# Altium PCB ATMEGA128RF.PcbDoc
Units mm, origin at the board's own origin, x right, y up, seen from the top; angles counter-clockwise.
Board outline 50 x 50 mm, 2 copper layers (Top Layer, Bottom Layer), stack 0.871 mm thick; 56 components, 45 nets, 208 pads, 122 vias.
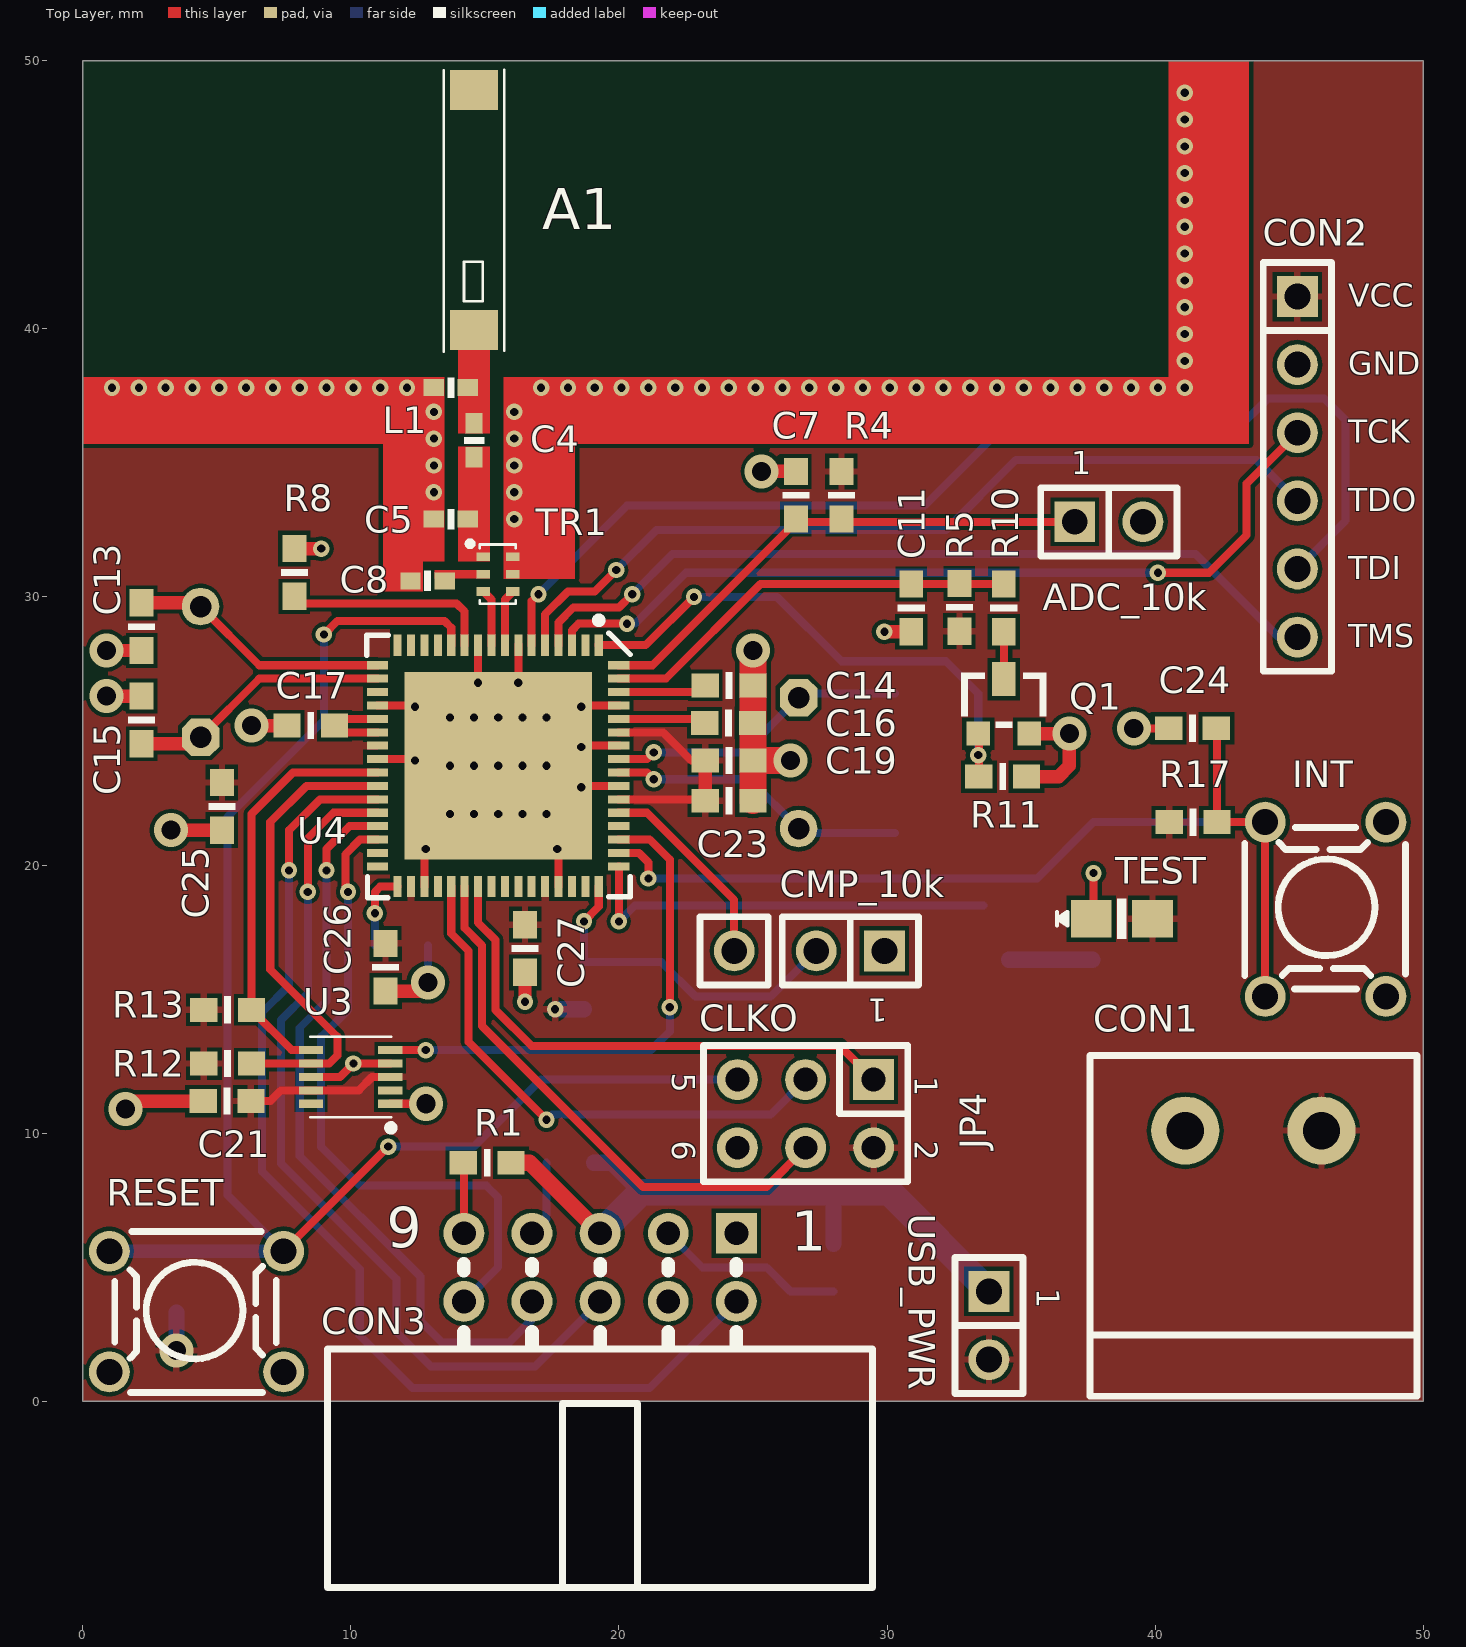
[diagram p0: Top Layer view]
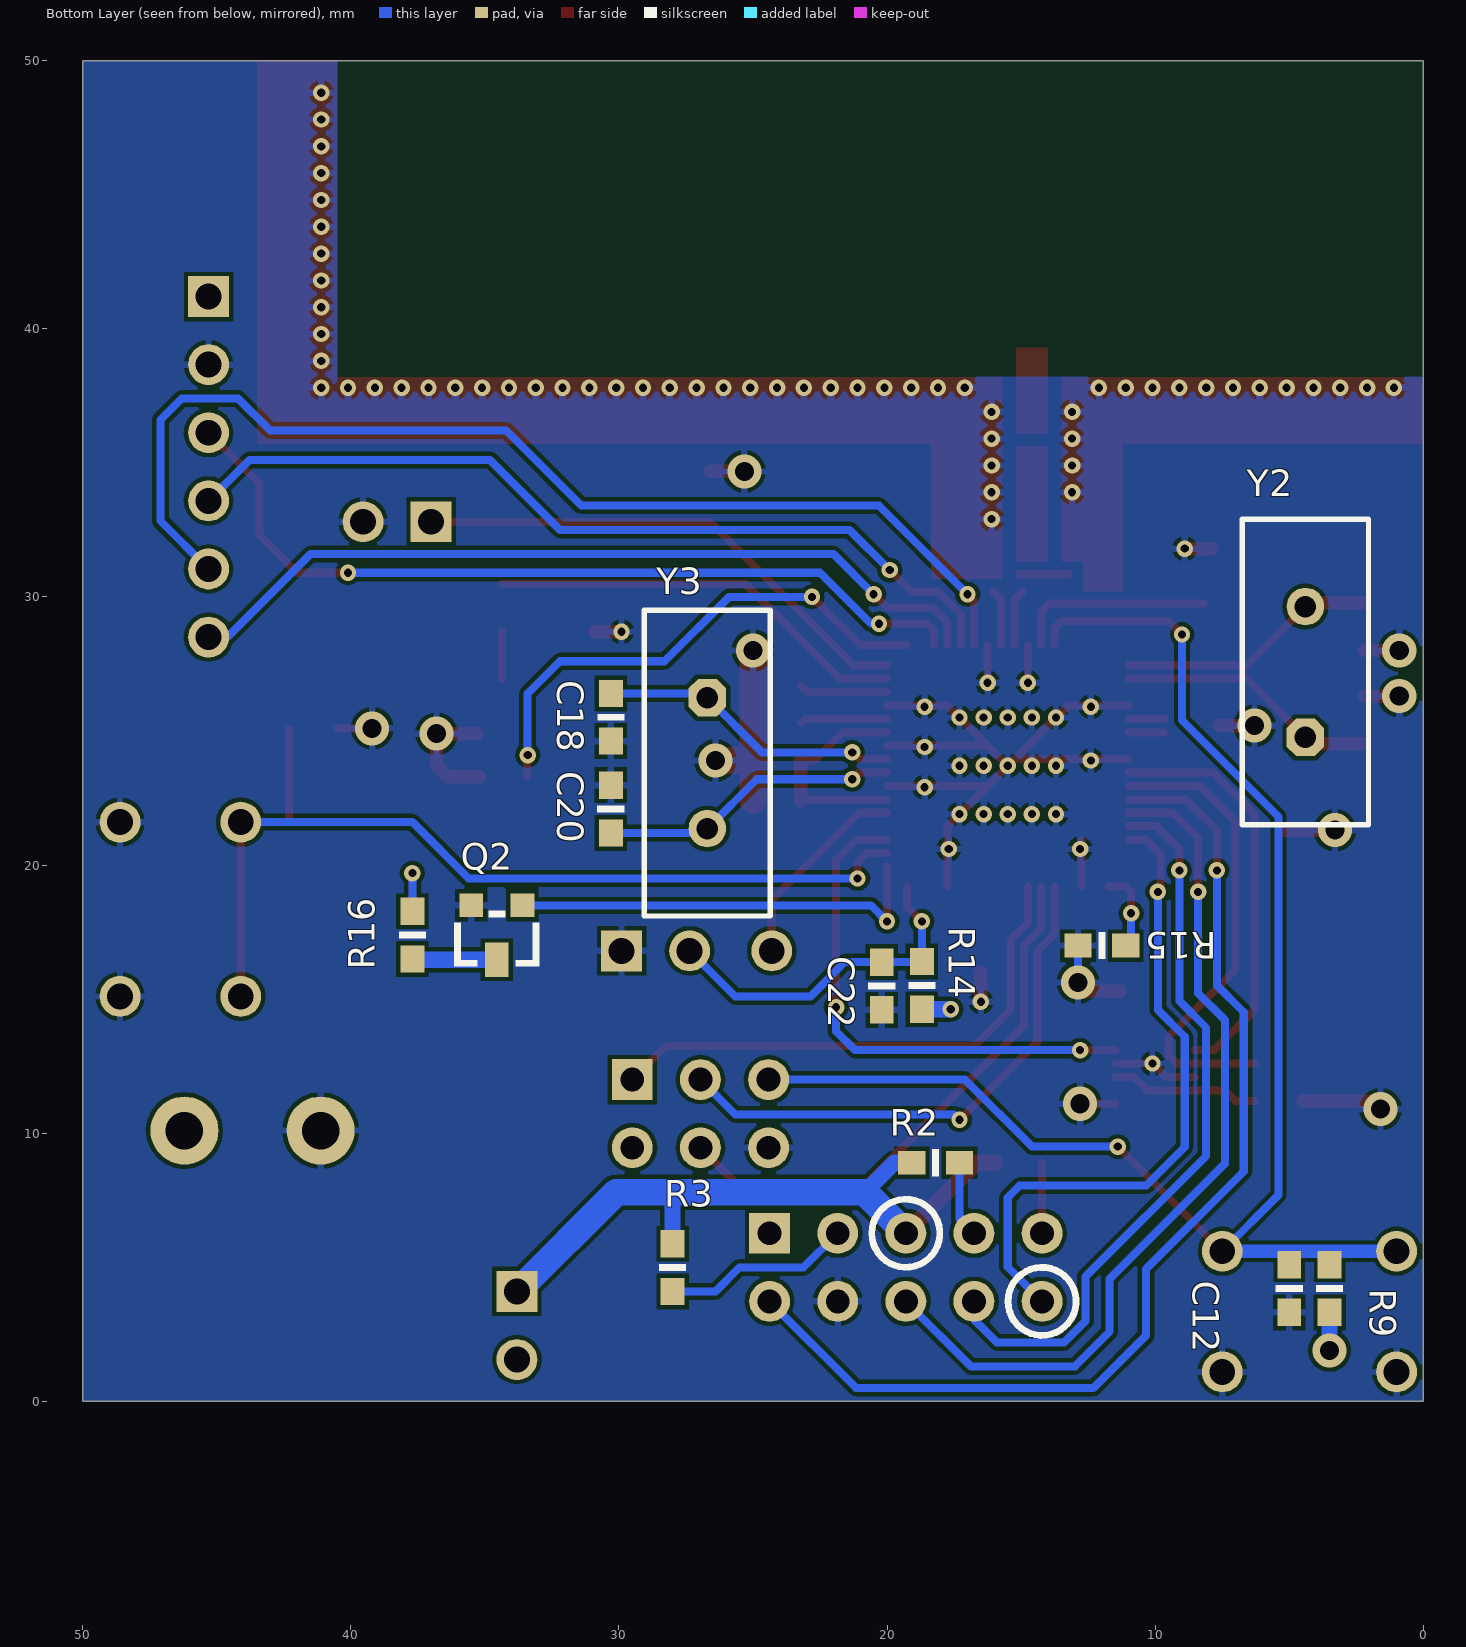
[diagram p1: Bottom Layer view, seen from below]

## Layer stack, top to bottom
Top Layer: signal copper 0.0356
Dielectric: core 0.8, FR-4, Dk 4.7
Bottom Layer: signal copper 0.0356

## Board outline
0,0 0,50 50,50 50,0 0,0

## Design rules (kind name [scope] priority, off if disabled: settings)
Clearance [All] p1: gap=0.152
HoleSize [All] p1: absolutevalues=TRUE maxlimit=2.54 minlimit=0.305 maxpercent=80.000 minpercent=20.000
PolygonConnect [All] p1: connectstyle=Relief reliefconductorwidth=0.254 reliefentries=4 polygonreliefangle="90 Angle"
RoutingVias [All] p1: holewidth=0.508 width=0.762 viastyle="Through Hole" minholewidth=0.305 minwidth=0.61 maxholewidth=0.711 maxwidth=1.27
SilkscreenOverComponentPads [All] p1: minsilkscreentomaskgap=0.254
SolderMaskExpansion [All] p1: expansion=0.102
Width [All] p1: maxlimit=2.54 minlimit=0.152 preferedwidth=0.254
26 further rules are at their usual default settings.

## Components (designator, comment, footprint, x,y, rotation, side; value= is the part's Value field where it differs from the comment)
A1 "2450AT45A100E" 2450AT45A100E 14.6,39.9 r90 top
ADC_10k "2P" SIP-2 37,32.8 r0 top
C4 "1.5pF" 0402 14.6,35.2 r90 top
C5 "1.5pF" 0402 13.1,32.9 r0 top
C7 "10nF" 0603 26.6,32.9 r90 top
C8 "22pF" 0402 13.5,30.6 r180 top
C11 "10nF" 0603 30.9,28.7 r90 top
C12 "10nF" 0603 5,5.1 r270 bottom
C13 "12pF" 0603 2.2,28 r90 top
C14 "1uF" 0603 25,26.7 r180 top
C15 "12pF" 0603 2.2,26.3 r270 top
C16 "1uF" 0603 23.2,25.3 r0 top
C17 "1uF" 0603 9.4,25.2 r180 top
C18 "12pF" 0603 30.3,26.4 r270 bottom
C19 "1uF" 0603 25,23.9 r180 top
C20 "12pF" 0603 30.3,21.2 r90 bottom
C21 "1uF" 0603 4.5,11.2 r0 top
C22 "10nF" 0603 20.2,14.6 r90 bottom
C23 "1uF" 0603 25,22.4 r180 top
C24 "10nF" 0603 40.5,25.1 r0 top
C25 "1uF" 0603 5.2,21.3 r90 top
C26 "1uF" 0603 11.3,15.3 r90 top
C27 "1uF" 0603 16.5,16 r90 top
CLKO "Test Point" TERMINAL 24.3,16.8 r0 top
CMP_10k "2P" SIP-2 29.9,16.8 r180 top
CON1 "2P" INTERLOCK2-5MM 46.2,10.1 r180 top
CON2 "6P" SIP-6-JTAG 45.3,41.2 r270 top
CON3 "10P" IDC-10-90 19.3,5 r0 top
INT "SW1" MICROSWITCH 44.1,21.6 r0 top
JP4 "6P" DIL-6 29.5,12 r270 top
L1 "3.9nH" 0402 13.1,37.8 r0 top
Q1 "BSS138" SOT-23@GSD 33.4,24.9 r0 top
Q2 "BSS138" SOT-23@GSD 33.6,18.5 r0 bottom
R1 "10K" 0603 14.2,8.9 r0 top
R2 "10K" 0603 17.3,8.9 r0 bottom
R3 "10K" 0603 28,4.1 r90 bottom
R4 "20K" 0603 28.3,32.9 r90 top
R5 "20K" 0603 32.7,30.5 r270 top
R8 "10K" 0603 7.9,31.8 r270 top
R9 "10K" 0603 3.5,5.1 r270 bottom
R10 "10K" 0603 34.35,28.7 r90 top
R11 "10K" 0603 35.2,23.3 r180 top
R12 "4.7k" 0603 6.3,12.6 r180 top
R13 "4.7k" 0603 6.3,14.6 r180 top
R14 "1K" 0603 18.7,16.4 r270 bottom
R15 "10K" 0603 11.1,17 r0 bottom
R16 "470R" 0603 37.7,16.5 r90 bottom
R17 "10K" 0603 42.3,21.6 r180 top
RESET "SW1" MICROSWITCH 1,1.1 r90 top
TEST "LED" 0805@DIODE 39.9,18 r180 top
TR1 "2450FB15L0001E" 0805@BALUN 15.95,30.2 r90 top
U3 "MMA7660FC" DFN-10 10,12.1 r180 top
U4 "ATmega128RFA1" QFN-64@EP 15.5,23.7 r270 top
USB_PWR "2P" SIP-2 33.8,4.1 r270 top
Y2 "32.768kHz" HC-49U 4.4,27.2 r90 bottom
Y3 "16MHz" HC-49U 26.7,23.8 r270 bottom

## Footprints (in the part's own frame and the unit in brackets; to place one, negate y for a bottom-side part, rotate by r counter-clockwise, add the part's x,y. Pads: shape width x height; smd on the part's side, far side on the other; paste and mask are expansions set on the pad)
0402 [mil]
  rect 30x25 smd: 1(0,0) 2(50,0)
  silkscreen extent 20,-15 30,15
0603 [mil]
  rect 40x35 smd: 1(0,0) 2(70,0)
  silkscreen extent 30,-20 40,20
0805@BALUN [mm]
  rect 0.32x0.5 smd: 1(1.3,1) 2(0.65,1) 3(0,1) 4(0,-0.1) 5(0.65,-0.1) 6(1.3,-0.1)
  silkscreen extent -0.46,-0.2 1.88,1.6
0805@DIODE [mil]
  rect 60x55 smd: A(0,0) K(90,0)
  silkscreen extent 38,-30 140,30
2450AT45A100E [mm]
  rect 1.5x1.8 smd: 1(0.05,0) ""(9,0)
  silkscreen extent -0.75,-1.12 9.75,1.12
DFN-10 [mm]
  rect 0.9x0.3 smd: 1(-1.475,1) 2(-1.475,0.5) 3(-1.475,0) 4(-1.475,-0.5) 5(-1.475,-1) 6(1.475,-1) 7(1.475,-0.5) 8(1.475,0) 9(1.475,0.5) 10(1.475,1)
  silkscreen extent -1.63,-1.5 1.5,2.02
DIL-6 [mil] "Dual inline 2x3 pins 2.54mm pitch"
  rect 60x60 hole 35: 1(0,0)
  round 60 hole 35: 2(100,0) 3(0,-100) 4(100,-100) 5(0,-200) 6(100,-200)
  silkscreen extent -50,-250 150,50
HC-49U [mm] "Quartz Crystal, Thru-Hole; 2 Leads; Body 11.35 x 4.65 x 13.46 mm (LxWxH max)"
  oct 1.4x1.4 hole 0.8: 1(-2.44,0)
  round 1.4 hole 0.8: 2(2.44,0)
  silkscreen extent -5.7,-2.35 5.7,2.35
IDC-10-90 [mil]
  rect 60x60 hole 35: 1(200,50)
  round 60 hole 35: 2(200,-50) 3(100,50) 4(100,-50) 5(0,50) 6(0,-50) 7(-100,50) 8(-100,-50) 9(-200,50) 10(-200,-50)
  silkscreen extent -400,-470 400,5
INTERLOCK2-5MM [mil]
  round 100 hole 55: 1(0,0) 2(200,0)
  silkscreen extent -140,-110 340,390
MICROSWITCH [mil]
  round 60 hole 38: 1(0,0) 2(177.16,0) 3(0,-255.9) 4(177.16,-255.9)
  silkscreen extent -30,-245 206,-8
QFN-64@EP [mm]
  rect 0.8x0.3 smd: 1(-4.5,3.75) 2(-4.5,3.25) 3(-4.5,2.75) 4(-4.5,2.25) 5(-4.5,1.75) 6(-4.5,1.25) 7(-4.5,0.75) 8(-4.5,0.25) 9(-4.5,-0.25) 10(-4.5,-0.75) 11(-4.5,-1.25) 12(-4.5,-1.75) 13(-4.5,-2.25) 14(-4.5,-2.75) 15(-4.5,-3.25) 16(-4.5,-3.75) 33(4.5,-3.75) 34(4.5,-3.25) 35(4.5,-2.75) 36(4.5,-2.25) 37(4.5,-1.75) 38(4.5,-1.25) 39(4.5,-0.75) 40(4.5,-0.25) 41(4.5,0.25) 42(4.5,0.75) 43(4.5,1.25) 44(4.5,1.75) 45(4.5,2.25) 46(4.5,2.75) 47(4.5,3.25) 48(4.5,3.75)
  rect 0.3x0.8 smd: 17(-3.75,-4.5) 18(-3.25,-4.5) 19(-2.75,-4.5) 20(-2.25,-4.5) 21(-1.75,-4.5) 22(-1.25,-4.5) 23(-0.75,-4.5) 24(-0.25,-4.5) 25(0.25,-4.5) 26(0.75,-4.5) 27(1.25,-4.5) 28(1.75,-4.5) 29(2.25,-4.5) 30(2.75,-4.5) 31(3.25,-4.5) 32(3.75,-4.5) 49(3.75,4.5) 50(3.25,4.5) 51(2.75,4.5) 52(2.25,4.5) 53(1.75,4.5) 54(1.25,4.5) 55(0.75,4.5) 56(0.25,4.5) 57(-0.25,4.5) 58(-0.75,4.5) 59(-1.25,4.5) 60(-1.75,4.5) 61(-2.25,4.5) 62(-2.75,4.5) 63(-3.25,4.5) 64(-3.75,4.5)
  rect 7x7 smd: PAD(0,0)
  silkscreen extent -5.55,-4.9 4.93,4.92
SIP-2 [mil]
  rect 60x60 hole 38: 1(0,0)
  round 60 hole 38: 2(100,0)
  silkscreen extent -50,-50 150,50
SIP-6-JTAG [mil] "JTAG Connector"
  rect 60x60 hole 38: 1(0,0)
  round 60 hole 38: 2(100,0) 3(200,0) 4(300,0) 5(400,0) 6(500,0)
  silkscreen extent -50,-50 550,50
SOT-23@GSD [mil] "SOT-23 (1-Gate , 2-Source, 3-Drain)"
  rect 35x50 smd: D(37.5,80)
  rect 35x35 smd: G(0,0) S(75,0)
  silkscreen extent -25,8 100,90
TERMINAL [mil]
  round 60 hole 37.99: 1(0,0)
  silkscreen extent -50,-50 50,50

## Part data
A1: library part "Antenna SE", "ANTENNA"
ADC_10k CMP_10k USB_PWR: library part JMP2, "2-pin Jumper"
C4 C5 C7 C8 C11 C12 C13 C14 C15 C16 C17 C18 C19 C20 C21 C22 C23 C24 C25 C26 C27: library part CAP, "Capacitor"
CLKO: library part TEST-PROBE, "Test/Probe Point"
CON1: library part CON02, "Connector 2 pins"
CON2: library part CON-JTAG, "Generic JTAG Connector"
CON3: library part CON10, "Connector 10 Pins"
INT RESET: "Switch Push Button"
JP4: library part JMP6, "6-Pin Jumper"
L1: library part IND, "Inductor"
Q1 Q2: library part MOSFET-N, "N-Channel Logic Level Enhancement Mode Field Effect Transistor"
R1 R2 R3 R4 R5 R8 R9 R10 R11 R12 R13 R14 R15 R16 R17: library part RES, "Resistor"
TEST: "Light emitting diode"
TR1: "FILTER BALUN ATMEL 2.45GHZ"
U3: "3-Axis Orientation/Motion Detection Sensor"
U4: "802.15.4 compliant AVR transceiver"
Y2 Y3: library part "Crystal Oscillator", "Crystal Oscillator"

## Via types
v1: diameter 0.61, hole 0.305, Top Layer to Bottom Layer, 109 vias
v2: diameter 1.27, hole 0.711, Top Layer to Bottom Layer, 13 vias

## Nets (pads, with @x,y where several pads share a name; then routed paths per layer and width w, separated by ;. In a path a pad name is that pad's centre, name@x,y a point inside that pad or via, vN(x,y) a via of type N, cw(c..) or ccw(c..) an arc to the next point about the centre after c; other vN are vias at no path point)
AREF: C14.2 U4.62 | length 3.3
  Top Layer w0.3: U4.62 22.972,26.45 C14.2
GND: ADC_10k.2 C5.1 C7.2 C8.2 C11.1 C12.2 C13.1 C14.1 C15.1 C16.2 C17.2 C18.2 C19.1 C20.2 C21.1 C22.1 C23.1 C24.1 C25.1 C26.1 C27.1 CMP_10k.1 CON1.2 CON2.2 CON3.4 INT.2 INT.4 JP4.6 L1.1 Q1.S Q2.S R8.1 R11.1 R15.2 RESET.1 RESET.3 TR1.5 TR1.6 U3.1 U3.4 U3.8 U4.7 U4.10 U4.20 U4.24 U4.35 U4.45 U4.55 U4.58 U4.61 U4.PAD | length 66.2
  Top Layer w0.3: U3.8 9.6,12.1 v1(10.1,12.6) U3.4 ; U4.24 U4.PAD@15.25,23.95 ; U4.20 13.25,25.95 v1(15.5,23.7) ; U3.1 v2(12.8,11.1) ; U4.35 U4.PAD@12.75,20.95 ; v1(14.75,26.8) U4.10 ; U4.PAD@16.25,22.95 U4.55 ; U4.PAD@16.25,24.45 U4.58 ; v1(16.25,26.8) U4.7 ; U4.45 17.75,21.45 v1(15.5,23.7) ; U4.61 17.75,25.95 v1(15.5,23.7) ; v2(39.2,25.1) C24.1
  Top Layer w0.5: v2(0.9,26.3) C15.1 ; v2(0.9,28) C13.1 ; v2(1.6,10.9) 1.9,11.2 C21.1 ; v2(3.3,21.3) C25.1 ; v2(6.3,25.2) C17.2 ; R8.1 v1(8.9,31.8) ; C26.1 12.556,15.3 v2(12.878,15.622) ; v1(16.5,14.9) C27.1 ; v2(25.322,34.678) C7.2 ; v1(29.9,28.7) C11.1 ; R11.1 36.4,23.3 36.8,23.7 v2(36.8,24.9) Q1.S
  Top Layer w1: C23.1 C19.1 ; v2(25,28) C14.1 C19.1 ; v2(26.4,23.9) C19.1
  Bottom Layer w0.3: v2(12.878,15.622) R15.2
  other v1: 12.8,20.6 17.7,20.6 13.7,21.9 14.6,21.9 15.5,21.9 16.4,21.9 17.3,21.9 18.6,22.9 13.7,23.7 14.6,23.7 16.4,23.7 17.3,23.7 12.4,23.9 18.6,24.4 13.7,25.5 14.6,25.5 15.5,25.5 16.4,25.5 17.3,25.5 12.4,25.9 18.6,25.9 16.1,32.9 13.1,33.9 16.1,33.9 13.1,34.9 16.1,34.9 13.1,35.9 16.1,35.9 13.1,36.9 16.1,36.9 1.1,37.8 2.1,37.8 3.1,37.8 4.1,37.8 5.1,37.8 6.1,37.8 7.1,37.8 8.1,37.8 9.1,37.8 10.1,37.8 11.1,37.8 12.1,37.8 17.1,37.8 18.1,37.8 19.1,37.8 20.1,37.8 21.1,37.8 22.1,37.8 23.1,37.8 24.1,37.8 25.1,37.8 26.1,37.8 27.1,37.8 28.1,37.8 29.1,37.8 30.1,37.8 31.1,37.8 32.1,37.8 33.1,37.8 34.1,37.8 35.1,37.8 36.1,37.8 37.1,37.8 38.1,37.8 39.1,37.8 40.1,37.8 41.1,37.8 41.1,38.8 41.1,39.8 41.1,40.8 41.1,41.8 41.1,42.8 41.1,43.8 41.1,44.8 41.1,45.8 41.1,46.8 41.1,47.8 41.1,48.8
JTAG_TCK: CON2.3 U4.3 | length 31.8
  Top Layer w0.3: U4.3 18.25,28.75 18.5,29 v1(20.3,29) ; v1(40.1,30.9) 42,30.9 43.4,32.3 43.4,34.22 CON2.3
  Bottom Layer w0.3: v1(20.3,29) 20.6,29 22.5,30.9 v1(40.1,30.9)
JTAG_TDI: CON2.5 U4.6 | length 41.8
  Top Layer w0.3: U4.6 16.75,29.85 v1(17,30.1)
  Bottom Layer w0.3: v1(17,30.1) 20.3,33.4 31.4,33.4 34.2,36.2 43,36.2 44.2,37.4 46.3,37.4 47.1,36.6 47.1,32.84 CON2.5
JTAG_TDO: CON2.4 U4.5 | length 32.2
  Top Layer w0.3: U4.5 17.25,29.35 18.1,30.2 19.1,30.2 v1(19.9,31)
  Bottom Layer w0.3: v1(19.9,31) 21.4,32.5 32.2,32.5 34.8,35.1 43.78,35.1 CON2.4
JTAG_TMS: CON2.6 U4.4 | length 30.7
  Top Layer w0.3: U4.4 17.75,29.05 18.3,29.6 20,29.6 v1(20.5,30.1)
  Bottom Layer w0.3: v1(20.5,30.1) 22,31.6 41.5,31.6 44.6,28.5 CON2.6
MISO: JP4.1 U4.39 | length 20
  Top Layer w0.3: U4.39 14.75,17.85 15.4,17.2 15.4,14.6 16.75,13.25 28.25,13.25 JP4.1
MOSI: JP4.4 U4.38 | length 20.6
  Top Layer w0.3: U4.38 14.25,17.65 14.9,17 14.9,14 20.9,8 25.5,8 JP4.4
NetA1_1: A1.1 C4.2 L1.2
NetADC_10k_1: ADC_10k.1 C7.1 R4.1 U4.64 | length 19.2
  Top Layer w0.3: U4.64 21.25,27.45 26.6,32.8 ADC_10k.1
NetC4_1: C4.1 C5.2 TR1.1
NetC8_1: C8.1 TR1.2
NetC11_2: C11.2 R5.1 R10.2 U4.63 | length 15.8
  Top Layer w0.3: U4.63 21.75,26.95 25.278,30.478 C11.2 R10.2
NetC13_2: C13.2 U4.17 Y2.2 | length 9.8
  Top Layer w0.3: Y2.2 6.59,27.45 U4.17
  Top Layer w0.5: C13.2 4.262,29.778 Y2.2
NetC15_2: C15.2 U4.18 Y2.1 | length 9.8
  Top Layer w0.3: Y2.1 6.59,26.95 U4.18
  Top Layer w0.5: C15.2 4.162,24.522 Y2.1
NetC16_1: C16.1 U4.60 | length 3.3
  Top Layer w0.3: U4.60 23.05,25.45 C16.1
NetC17_1: C17.1 U4.21 U4.22 | length 2.7
  Top Layer w0.3: C17.1@9.65,24.95 U4.22 ; C17.1@9.65,25.45 U4.21
NetC18_1: C18.1 U4.57 Y3.1 | length 11.3
  Top Layer w0.3: U4.57 21.05,23.95 v1(21.3,24.2)
  Bottom Layer w0.3: v1(21.3,24.2) 24.66,24.2 Y3.1 26.86,26.4 C18.1
NetC20_1: C20.1 U4.56 Y3.2 | length 11.2
  Top Layer w0.3: U4.56 21.05,23.45 v1(21.3,23.2)
  Bottom Layer w0.3: v1(21.3,23.2) 24.86,23.2 Y3.2 26.86,21.2 C20.1
NetC22_2: C22.2 CMP_10k.2 R14.1 U4.48 | length 12.9
  Top Layer w0.3: v1(18.7,17.9) 19.25,18.45 U4.48
  Bottom Layer w0.3: v1(18.7,17.9) R14.1 18.722,16.378 C22.2 21.582,16.378 22.86,15.1 25.66,15.1 CMP_10k.2
NetC24_2: C24.2 INT.1 INT.3 R17.1 U4.50 | length 37.5
  Top Layer w0.3: U4.50 20.75,20.45 21.1,20.1 v1(21.1,19.5) ; C24.2@42.3,25.078 R17.1 INT.1 INT.3
  Bottom Layer w0.3: v1(21.1,19.5) 35.6,19.5 37.7,21.6 INT.1
NetCLKO_1: CLKO.1 U4.53 | length 7.5
  Top Layer w0.3: U4.53 21.05,21.95 24.3,18.7 CLKO.1
NetCON3_3: CON3.3 R3.1 | length 7.1
  Bottom Layer w0.3: CON3.3 23.11,5 25.5,5 26.4,4.1 R3.1
NetCON3_7: CON3.7 R2.1 | length 2.9
  Bottom Layer w0.3: CON3.7 17.3,6.81 R2.1
NetCON3_9: CON3.9 R1.1 | length 2.6
  Top Layer w0.3: R1.1 14.22,8.88 CON3.9
NetQ1_D: Q1.D R10.1 | length 1.8
  Top Layer w0.3: Q1.D R10.1@34.352,28.697
NetQ1_G: Q1.G R11.2 U4.1 | length 20.3
  Top Layer w0.3: U4.1 21,28.2 v1(22.8,30) ; R11.2 Q1.G@33.422,24.878
  Bottom Layer w0.3: v1(22.8,30) 25.9,30 28.3,27.6 32.2,27.6 33.4,26.4 v1(33.4,24.1)
NetQ2_D: Q2.D R16.1 | length 3.2
  Bottom Layer w0.3: R16.1@37.668,16.468 R16.1
  Bottom Layer w0.6: Q2.D R16.1@37.668,16.468
NetQ2_G: Q2.G U4.49 | length 15.9
  Top Layer w0.3: v1(20,17.9) U4.49
  Bottom Layer w0.3: v1(20,17.9) 20.6,18.5 Q2.G
NetR8_2: R8.2 U4.11 | length 7.5
  Top Layer w0.3: R8.2@8.172,29.75 13.95,29.75 14.25,29.45 U4.11
NetR15_1: R15.1 U4.33 | length 2.9
  Top Layer w0.3: v1(10.9,18.2) 10.9,19 11.1,19.2 U4.33
  Bottom Layer w0.3: R15.1@10.9,17 v1(10.9,18.2)
NetR16_2: R16.2 TEST.K | length 3.2
  Top Layer w0.3: TEST.K 37.7,18.086 v1(37.7,19.7)
  Bottom Layer w0.3: R16.2 v1(37.7,19.7)
NetTR1_3: TR1.3 U4.9 | length 2.1
  Top Layer w0.3: TR1.3 15.25,29.9 U4.9
NetTR1_4: TR1.4 U4.8 | length 2.1
  Top Layer w0.3: U4.8 15.75,29.9 TR1.4
NetU3_5: U3.5 U4.51 | length 19.3
  Top Layer w0.3: U3.5 v1(12.8,13.1) ; U4.51 21.15,20.95 21.9,20.2 v1(21.9,14.7)
  Bottom Layer w0.3: v1(12.8,13.1) 21.2,13.1 21.9,13.8 v1(21.9,14.7)
RSTZ: C12.1 JP4.5 R9.1 RESET.2 RESET.4 U4.12 | length 57.1
  Top Layer w0.3: RESET.4 v1(11.4,9.5) ; v1(9,28.6) 9.5,29.1 13.5,29.1 13.75,28.85 U4.12
  Bottom Layer w0.3: RESET.4 5.4,7.7 5.4,21.8 9,25.4 v1(9,28.6) ; v1(11.4,9.5) 14.6,9.5 17.1,12 JP4.5
  Bottom Layer w0.5: RESET.2 RESET.4
SCK: JP4.3 U4.37 | length 20.5
  Top Layer w0.3: U4.37 13.75,17.45 14.4,16.8 14.4,13.4 v1(17.3,10.5)
  Bottom Layer w0.3: v1(17.3,10.5) 17.5,10.7 25.66,10.7 JP4.3
SCL: R13.1 U3.6 U4.25 | length 15.5
  Top Layer w0.3: U3.6 7.8,13.1 R13.1 6.3,21.9 7.85,23.45 U4.25
SDA: R12.1 U3.7 U4.26 | length 17.6
  Top Layer w0.3: R12.1 U3.7 9.2,12.6 9.5,12.9 9.5,13.6 7,16.1 7,21.6 8.35,22.95 U4.26
SER_CTS: CON3.10 U4.30 | length 24.5
  Top Layer w0.3: v1@9.8,19 9.8,20.4 10.35,20.95 U4.30
  Bottom Layer w0.3: v1(9.9,19) 9.9,14.6 8.9,13.6 8.9,9.488 10.344,8.044 15.056,8.044 15.5,7.6 15.5,5.01 CON3.10
SER_RTS: CON3.8 U4.29 | length 27.6
  Top Layer w0.3: v1(9.1,19.8) 9.1,20.6 9.95,21.45 U4.29
  Bottom Layer w0.3: v1(9.1,19.8) 9.1,14.931 8.1,13.931 8.1,9.156 12.6,4.656 12.6,3 13.4,2.2 15.9,2.2 16.76,3.06 CON3.8
SER_RX: CON3.6 U4.28 | length 32.7
  Top Layer w0.3: v1(8.4,19) 8.4,21 9.35,21.95 U4.28
  Bottom Layer w0.3: v1(8.4,19) 8.4,15.221 7.4,14.221 7.4,8.866 11.7,4.566 11.7,2.6 13,1.3 16.87,1.3 CON3.6
SER_TX: CON3.2 U4.27 | length 40.7
  Top Layer w0.3: v1(7.7,19.8) 7.7,21.3 8.85,22.45 U4.27
  Bottom Layer w0.3: v1(7.7,19.8) 7.7,15.511 6.7,14.511 6.7,8.576 10.338,4.938 10.338,2.462 12.3,0.5 21.15,0.5 CON3.2
VCC: C19.2 C21.2 C23.2 C25.2 C26.2 C27.2 CON1.1 CON2.1 JP4.2 R4.2 R5.2 R9.2 R12.2 R13.2 R14.2 R17.2 TEST.A U3.3 U3.9 U4.23 U4.34 U4.44 U4.54 U4.59 USB_PWR.2 | length 16.5
  Top Layer w0.3: C21.2 7,11.2 7.4,11.6 U3.9 10.3,11.6 10.8,12.1 U3.3 ; U4.54 23.172,22.45 C23.2 ; U4.59 21.65,24.95 22.7,23.9 C19.2
  Top Layer w0.5: C23.2 C19.2
  Bottom Layer w0.6: v2(3.5,1.9) R9.2 ; v1(17.622,14.622) R14.2
VDD_LDO: CON3.5 R1.2 R2.2 R3.2 USB_PWR.1 | length 25.1
  Top Layer w0.6: R1.2 16.67,8.9 CON3.5
  Bottom Layer w0.6: R2.2 19.73,8.9 20.83,7.8 ; R3.2 28,7.7
  Bottom Layer w1: CON3.5 20.83,7.8 30.1,7.8 USB_PWR.1
pads on no net: A1. CON3.1 U3.2 U3.10 U4.2 U4.13 U4.14 U4.15 U4.16 U4.19 U4.31 U4.32 U4.36 U4.40 U4.41 U4.42 U4.43 U4.46 U4.47 U4.52

## Polygon pours and split planes (outlines as drawn)
VCC on Top Layer "VCC" (solid, remove dead copper, pour order 9): 0,0 0,37.5 42.5,37.5 42.5,50 50,50 50,0 0,0
GND on Bottom Layer "GND" (solid, remove dead copper, pour order 11): 0,0 0,38.2 40.4,38.2 40.5,38.2 40.5,50 50,50 50,0 0,0

## Other copper
Top Layer:
  rectangle net NetC8_1: 13.12,30.69 15.2,31.012
  rectangle net GND: 15.7,30.675 18.367,38.2
  rectangle net NetA1_1: 14,36.1 15.2,39.3
  rectangle net GND: 11.2,31.325 13.5,38.2
  rectangle net NetC4_1: 14,31.325 15.2,35.6
  rectangle net GND: 0,35.7 11.2,38.2
  rectangle net GND: 18.3,35.7 43.5,38.2
  rectangle net GND: 40.5,38.2 43.5,50
  rectangle net GND: 11.2,30.2 12.7,31.325

## Silkscreen, mask and mechanical layers (free items; w line width, h text height)
Mechanical 1:
  the board outline again, w0.1

## Text inside footprints (layer, text, board x,y; h text height)
ADC_10k: Top Overlay "1" at 36.873,34.578 h0.86
CMP_10k: Top Overlay "1" at 30.027,15.022 h0.86 r180
CON2: Top Overlay "TMS" at 47.205,28.119 h0.86; Top Overlay "TDI" at 47.205,30.659 h0.86; Top Overlay "TDO" at 47.205,33.199 h0.86; Top Overlay "TCK" at 47.205,35.739 h0.86; Top Overlay "GND" at 47.205,38.279 h0.86; Top Overlay "VCC" at 47.205,40.819 h0.86
CON3: Top Overlay "1" at 26.425,5.625 h1.5; Top Overlay "9" at 11.35,5.75 h1.5
JP4: Top Overlay "2" at 31.024,9.714 h0.86 r270; Top Overlay "5" at 21.982,12.254 h0.86 r270; Top Overlay "6" at 21.982,9.714 h0.86 r270; Top Overlay "1" at 31.024,12.127 h0.86 r270
USB_PWR: Top Overlay "1" at 35.578,4.227 h0.86 r270